# Altium PCB master.PcbDoc
Units mm, origin at the board's own origin, x right, y up, seen from the top; angles counter-clockwise.
Board outline 152.4 x 101.6 mm, 2 copper layers (Top Layer, Bottom Layer); 8 components, 0 nets, 78 pads, 0 vias.
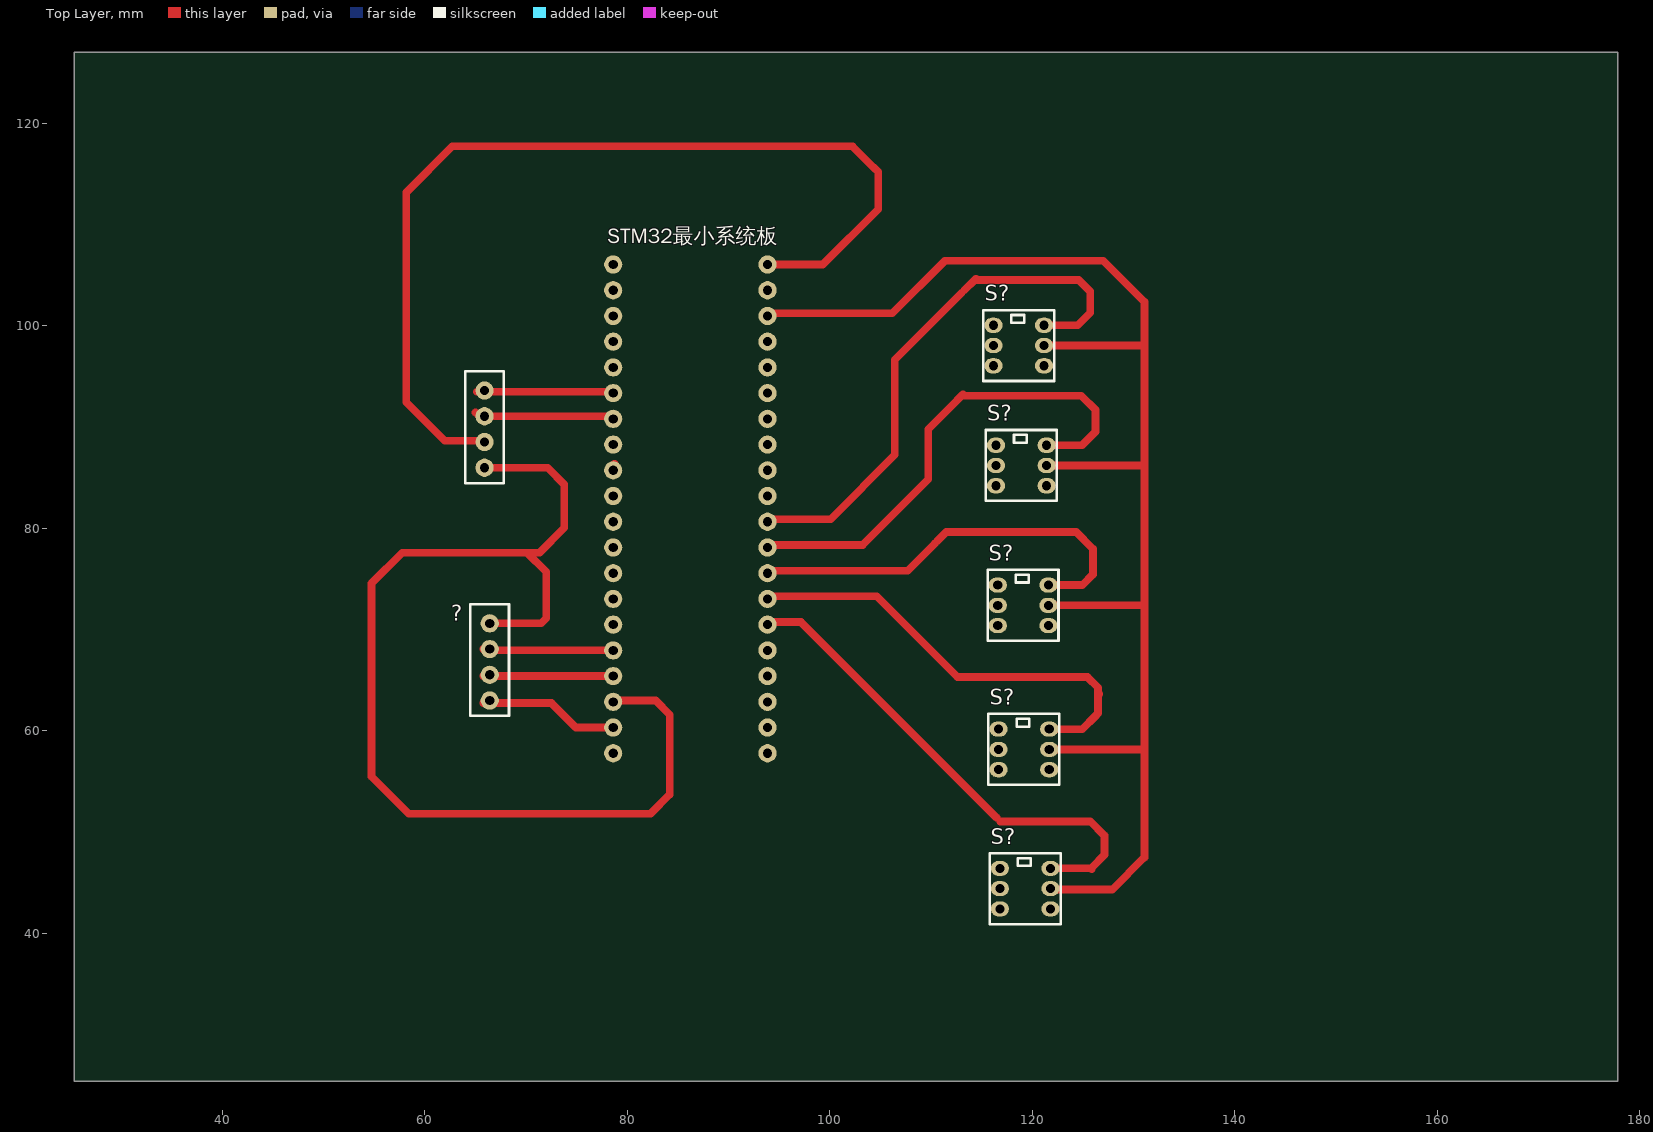
[diagram p0: Top Layer view]
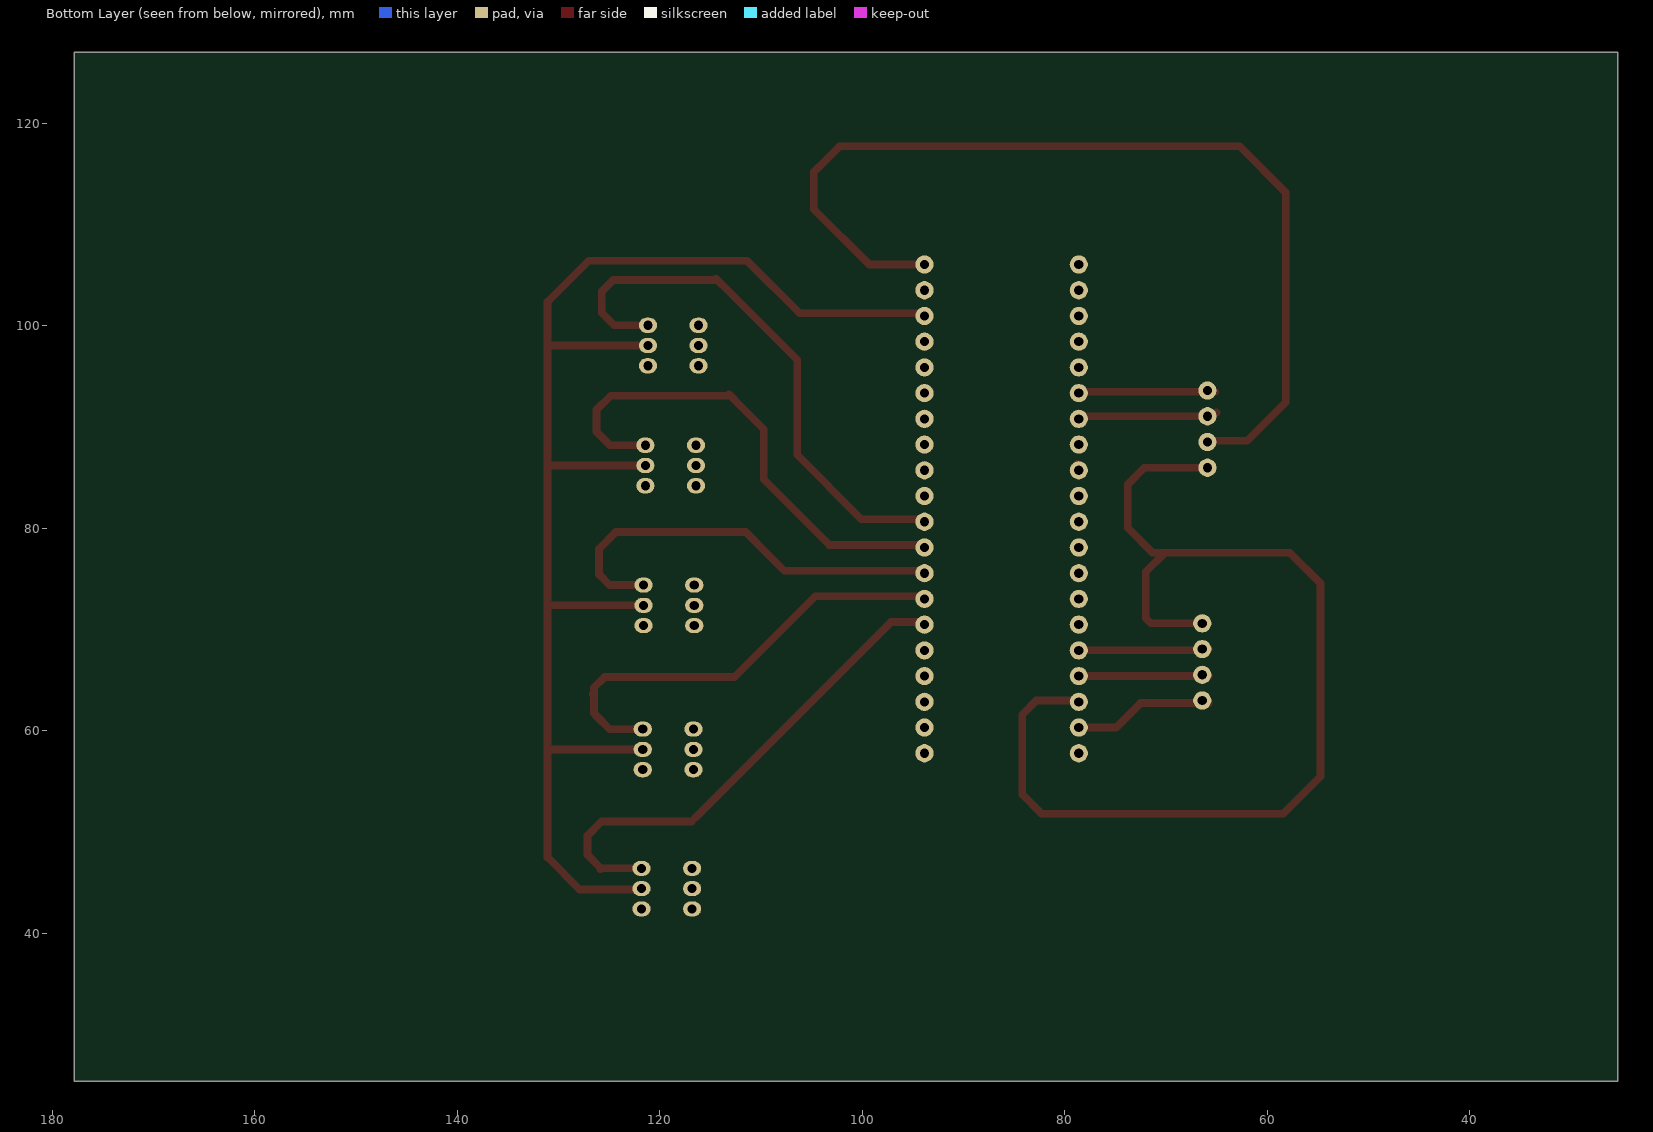
[diagram p1: Bottom Layer view, seen from below]

## Layer stack, top to bottom
Top Solder: solder mask 0.0102, Solder Resist, Dk 3.5
Top Layer: signal copper 0.0356
Dielectric 1: dielectric 0.32, FR-4, Dk 4.8
Bottom Layer: signal copper 0.0356
Bottom Solder: solder mask 0.0102, Solder Resist, Dk 3.5

## Board outline
25.4,25.4 177.8,25.4 177.8,127 25.4,127

## Design rules (kind name [scope] priority, off if disabled: settings)
Clearance [All] p1: gap=0.254
PolygonConnect [All] p1: connectstyle=Relief reliefconductorwidth=0.254 reliefentries=4 polygonreliefangle="90 Angle" airgapwidth=0.254
RoutingVias [All] p1: holewidth=0.711 width=1.27 viastyle="Through Hole" minholewidth=0.711 minwidth=1.27 maxholewidth=0.711 maxwidth=1.27
SolderMaskExpansion [All] p1: expansion=0.102
Width [All] p1: maxlimit=0.762 minlimit=0.508 preferedwidth=0.762 bottomlayer_minwidth=0 minimp=50.000000 maximp=50.000000 favimp=50.000000
30 further rules are at their usual default settings.

## Classes and differential pairs
component class master: ? S? STM32最小系统板 ""

## Components (designator, comment, footprint, x,y, rotation, side; value= is the part's Value field where it differs from the comment)
? "HC_SR04" PCBComponent_1 66.421,70.612 r0 top
S? "7*7自锁开关" 7*7自锁开关 116.666,60.166 r0 top
S? "7*7自锁开关" 7*7自锁开关 116.412,88.201 r0 top
S? "7*7自锁开关" 7*7自锁开关 116.586,74.39 r0 top
S? "7*7自锁开关" 7*7自锁开关 116.158,100.044 r0 top
S? "7*7自锁开关" 7*7自锁开关 116.793,46.418 r0 top
STM32最小系统板 "STM32最小系统板" STM32最小系统板 78.613,106.045 r0 top
? "usart1" PCBComponent_1 65.913,93.599 r0 top

## Footprints (in the part's own frame and the unit in brackets; to place one, negate y for a bottom-side part, rotate by r counter-clockwise, add the part's x,y. Pads: shape width x height; smd on the part's side, far side on the other; paste and mask are expansions set on the pad)
7*7自锁开关 [mm]
  oval 1.8x1.5 hole 0.9: 1(0,0) 2(0,-2) 3(0,-4) 4(5,-4) 5(5,-2) 6(5,0)
  silkscreen extent -1,-5.5 6,1.5, body extent -0.39,-4.86 5.41,0.94, height 10
PCBComponent_1 [mm]
  round 1.8 hole 0.9: 1(0,0) 2(0,-2.54) 3(0,-5.08) 4(0,-7.62)
  silkscreen extent -1.91,-9.14 1.91,1.91
STM32最小系统板 [mm]
  round 1.8 hole 0.9: 1(0,0) 2(0,-2.54) 3(0,-5.08) 4(0,-7.62) 5(0,-10.16) 6(0,-12.7) 7(0,-15.24) 8(0,-17.78) 9(0,-20.32) 10(0,-22.86) 11(0,-25.4) 12(0,-27.94) 13(0,-30.48) 14(0,-33.02) 15(0,-35.56) 16(0,-38.1) 17(0,-40.64) 18(0,-43.18) 19(0,-45.72) 20(0,-48.26) 21(15.24,0) 22(15.24,-2.54) 23(15.24,-5.08) 24(15.24,-7.62) 25(15.24,-10.16) 26(15.24,-12.7) 27(15.24,-15.24) 28(15.24,-17.78) 29(15.24,-20.32) 30(15.24,-22.86) 31(15.24,-25.4) 32(15.24,-27.94) 33(15.24,-30.48) 34(15.24,-33.02) 35(15.24,-35.56) 36(15.24,-38.1) 37(15.24,-40.64) 38(15.24,-43.18) 39(15.24,-45.72) 40(15.24,-48.26)

## Part data
? ?: library part Component_1

## Nets (pads, with @x,y where several pads share a name; then routed paths per layer and width w, separated by ;. In a path a pad name is that pad's centre, name@x,y a point inside that pad or via, vN(x,y) a via of type N, cw(c..) or ccw(c..) an arc to the next point about the centre after c; other vN are vias at no path point)
pads on no net: ?.1 ?.2 ?.3 ?.4 S?.1 S?.2 S?.3 S?.4 S?.5 S?.6 STM32最小系统板.1 STM32最小系统板.2 STM32最小系统板.3 STM32最小系统板.4 STM32最小系统板.5 STM32最小系统板.6 STM32最小系统板.7 STM32最小系统板.8 STM32最小系统板.9 STM32最小系统板.10 STM32最小系统板.11 STM32最小系统板.12 STM32最小系统板.13 STM32最小系统板.14 STM32最小系统板.15 STM32最小系统板.16 STM32最小系统板.17 STM32最小系统板.18 STM32最小系统板.19 STM32最小系统板.20 STM32最小系统板.21 STM32最小系统板.22 STM32最小系统板.23 STM32最小系统板.24 STM32最小系统板.25 STM32最小系统板.26 STM32最小系统板.27 STM32最小系统板.28 STM32最小系统板.29 STM32最小系统板.30 STM32最小系统板.31 STM32最小系统板.32 STM32最小系统板.33 STM32最小系统板.34 STM32最小系统板.35 STM32最小系统板.36 STM32最小系统板.37 STM32最小系统板.38 STM32最小系统板.39 STM32最小系统板.40
copper on no net: | length 660.6
  Top Layer w0.762: 65.024,91.44 65.405,91.059 78.74,91.059 ; 65.151,93.472 78.613,93.472 78.74,93.599 ; 65.278,88.646 61.976,88.646 58.166,92.456 58.166,113.157 62.738,117.729 102.235,117.729 104.057,115.907 104.394,115.57 104.775,115.189 104.775,114.554 104.775,111.506 99.314,106.045 93.853,106.045 ; 65.532,86.233 65.659,86.106 ; 65.786,62.738 72.517,62.738 74.93,60.325 78.994,60.325 ; 65.786,65.405 78.994,65.405 ; 65.786,68.072 65.913,67.945 78.994,67.945 ; 65.913,85.979 72.136,85.979 73.787,84.328 73.787,80.264 73.787,80.05 71.334,77.597 57.785,77.597 54.737,74.549 54.737,55.499 58.42,51.816 82.296,51.816 84.201,53.721 84.201,60.325 84.201,61.595 82.804,62.992 78.867,62.992 ; 66.421,70.612 71.501,70.612 72.009,71.12 72.009,72.517 72.009,75.311 72.009,75.692 70.104,77.597 ; 78.486,86.106 78.74,86.36 ; 93.98,70.739 97.155,70.739 116.459,51.435 ; 93.98,73.279 104.648,73.279 112.617,65.31 125.444,65.31 126.492,64.262 126.492,63.627 ; 93.98,75.819 107.696,75.819 110.395,78.518 ; 93.98,80.899 100.076,80.899 106.426,87.249 106.426,96.647 113.03,103.251 ; 93.98,101.219 106.172,101.219 111.379,106.426 127,106.426 131.064,102.362 131.064,98.298 ; 94.107,78.359 103.251,78.359 109.728,84.836 109.728,89.789 111.887,91.948 113.157,93.218 113.284,93.091 124.841,93.091 126.238,91.694 126.238,89.535 126.111,89.408 124.904,88.201 121.412,88.201 ; 110.617,78.74 111.506,79.629 124.333,79.629 125.984,77.978 125.984,77.597 125.984,75.438 124.936,74.39 121.586,74.39 ; 113.284,103.505 114.3,104.521 ; 114.427,104.648 114.3,104.521 ; 116.84,51.054 118.618,51.054 125.73,51.054 127.127,49.657 127.127,47.752 125.857,46.482 125.857,46.355 125.794,46.418 121.793,46.418 ; 121.158,98.044 130.81,98.044 131.064,98.298 ; 121.158,100.044 124.492,100.044 125.73,101.282 125.73,103.378 124.587,104.521 114.3,104.521 ; 121.412,86.201 130.905,86.201 131.064,86.36 ; 121.586,72.39 130.937,72.39 131.064,72.517 ; 121.666,58.166 130.81,58.166 131.064,58.42 ; 121.666,60.166 124.936,60.166 126.238,61.468 126.492,61.722 126.492,63.627 ; 121.793,44.418 121.888,44.323 127.889,44.323 131.064,47.498 131.064,58.42 ; 126.619,63.627 126.492,63.754 126.492,63.627 ; 131.064,58.42 131.064,72.517 ; 131.064,72.517 131.064,86.36 ; 131.064,86.36 131.064,98.298